# Altium PCB PCB_Rocket_Sheild.PcbDoc
Units mil, origin at the board's own origin, x right, y up, seen from the top; angles counter-clockwise.
Board outline 6000 x 4000 mil, 2 copper layers (Top Layer, Bottom Layer); 19 components, 22 nets, 73 pads, 0 vias.
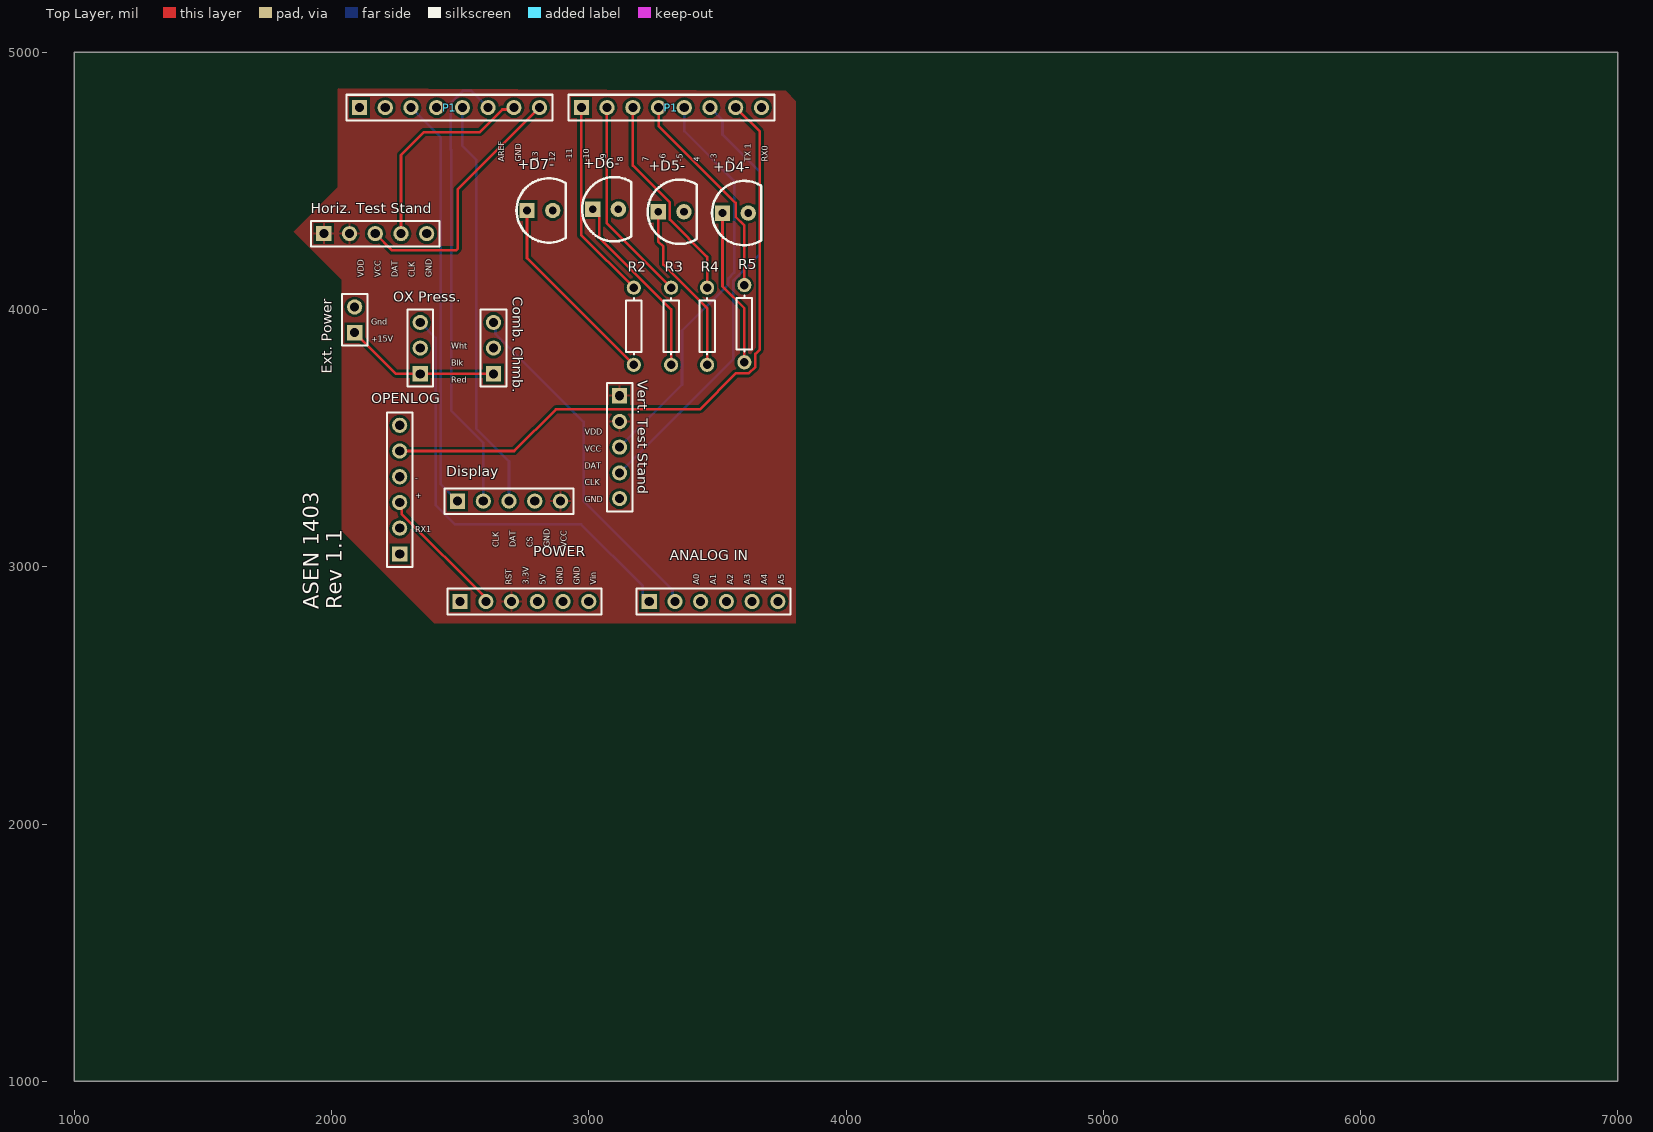
[diagram p0: Top Layer view]
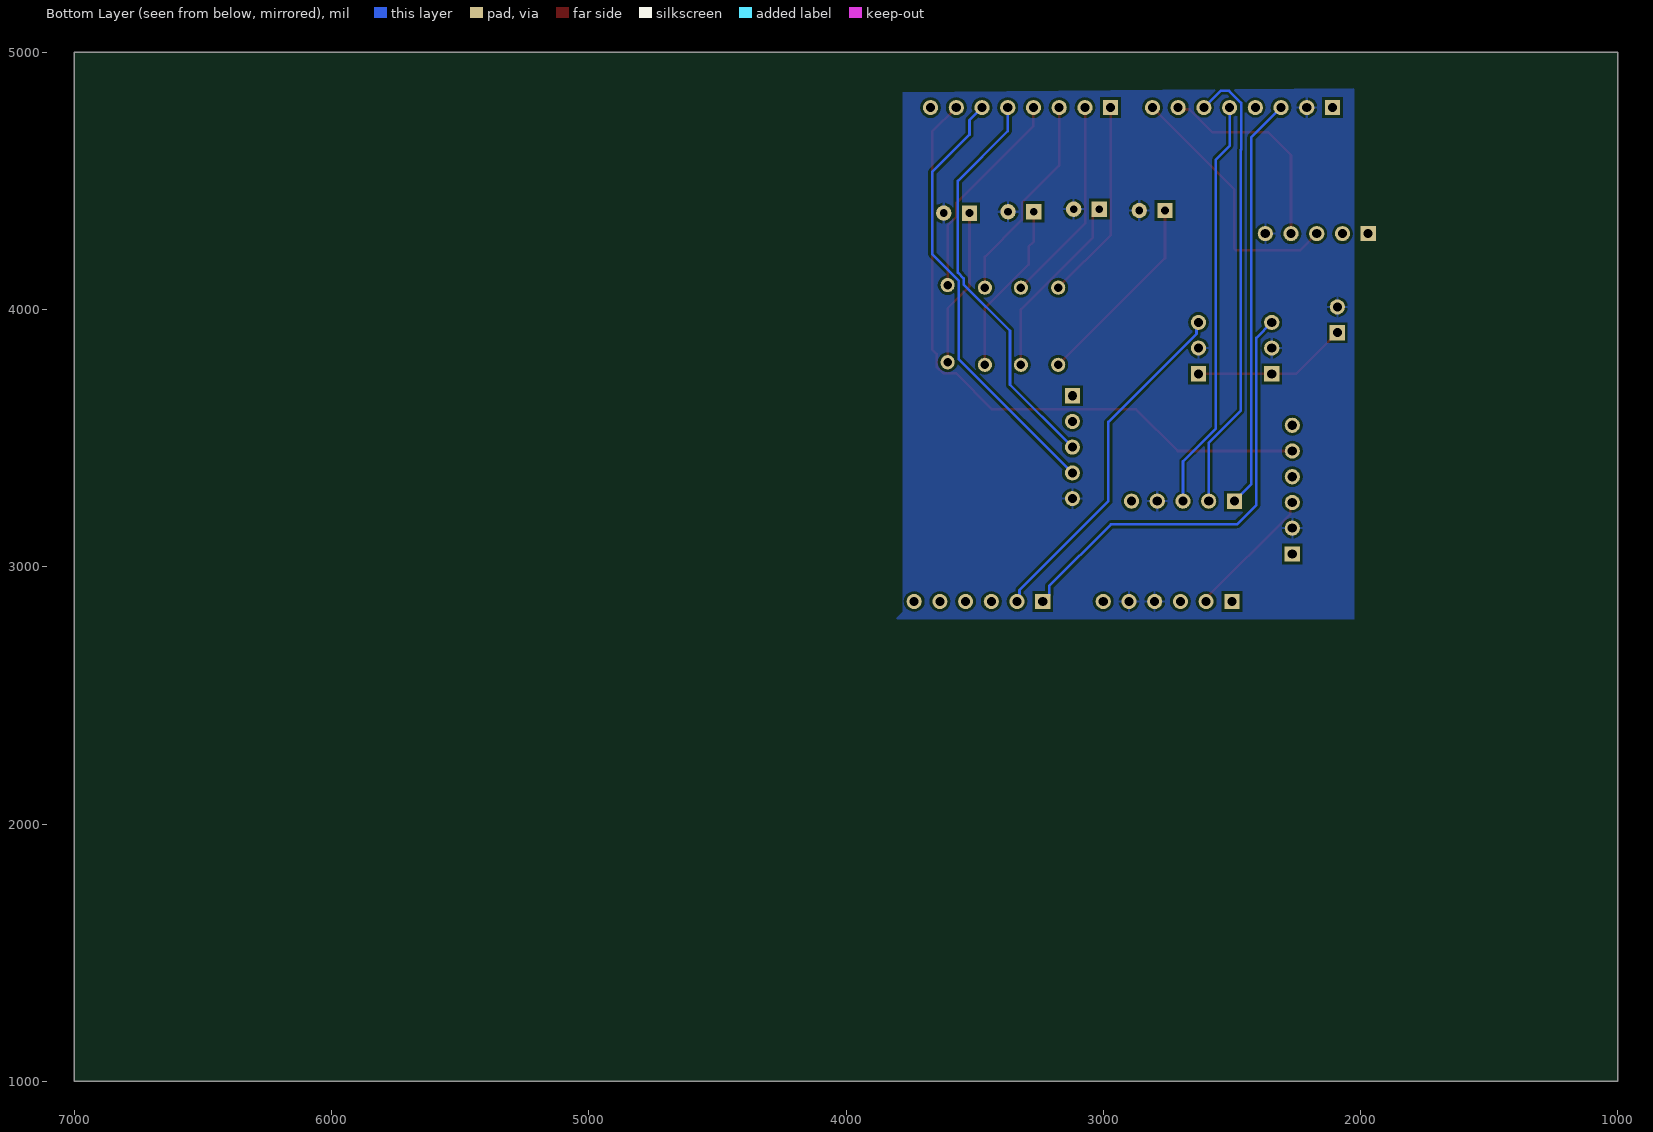
[diagram p1: Bottom Layer view, seen from below]

## Layer stack, top to bottom
Top Solder: solder mask 0.4, Solder Resist, Dk 3.5
Top Layer: signal copper 1.4
Dielectric 1: dielectric 12.6, FR-4, Dk 4.8
Bottom Layer: signal copper 1.4
Bottom Solder: solder mask 0.4, Solder Resist, Dk 3.5

## Board outline
1000,1000 7000,1000 7000,5000 1000,5000

## Design rules (kind name [scope] priority, off if disabled: settings)
Clearance [All] p1: gap=10 ignorepadtopadclearanceinfootprint=FALSE except(0: Arc-Hole Track-Hole SMDPad-Hole THPad-Hole Via-Hole Fill-Hole Poly-Hole Region-Hole Text-Hole)
PolygonConnect [All] p1: connectstyle=Relief reliefconductorwidth=10 reliefentries=4 polygonreliefangle="90 Angle" airgapwidth=10
RoutingVias [All] p1: holewidth=28 width=50 viastyle="Through Hole" minholewidth=28 minwidth=50 maxholewidth=28 maxwidth=50
SolderMaskExpansion [All] p1: expansion=4
Width [All] p1: maxlimit=10 minlimit=10 preferedwidth=10
30 further rules are at their usual default settings.

## Classes and differential pairs
component class Schematic_Rocket_Shield: +D4- +D5- +D6- +D7- "ANALOG IN" "Comb. Chmb." Display "Ext. Power" "Horiz. Test Stand" OPENLOG "OX Press." P1 POWER R2 R3 R4 R5 "Vert. Test Stand"

## Components (designator, comment, footprint, x,y, rotation, side; value= is the part's Value field where it differs from the comment)
+D4- "LED1" PCBComponent_1 3620,4375 r0 top
+D5- "LED1" PCBComponent_1 3370,4380 r0 top
+D6- "LED1" PCBComponent_1 3115,4390 r0 top
+D7- "LED1" PCBComponent_1 2860,4385 r0 top
"ANALOG IN" "Header 6" HDR1X6 3235,2865 r0 top locked
"Comb. Chmb." "Header 3" HDR1X3 2630,3750 r90 top (schematic designator Press2)
Display "LED Display" HDR1X5 2490,3255 r0 top
"Ext. Power" "Header 2" HDR1X2 2090,3910 r90 top
"Horiz. Test Stand" "Load Cell 2" HDR1X5 1970,4295 r0 top (schematic designator "Load Cell 2")
OPENLOG "Header 6" HDR1X6 2265,3050 r90 top
"OX Press." "Header 3" HDR1X3 2345,3750 r90 top (schematic designator Press1)
P1 "Header 8" HDR1X8 2971.25,4785 r0 top locked
P1 "eader 8" HDR1X8 2108.75,4785 r0 top locked
POWER "Header 6" HDR1X6 2500,2865 r0 top locked
R2 "" AXIAL-0.3 3175,3935 r90 top value=330K
R3 "" AXIAL-0.3 3320,3935 r90 top value=330K
R4 "" AXIAL-0.3 3460,3935 r90 top value=330K
R5 "" AXIAL-0.3 3605,3945 r90 top value=330K
"Vert. Test Stand" "Load Cell 1" HDR1X5 3120,3665 r270 top (schematic designator "Load Cell 1")

## Footprints (in the part's own frame and the unit in brackets; to place one, negate y for a bottom-side part, rotate by r counter-clockwise, add the part's x,y. Pads: shape width x height; smd on the part's side, far side on the other; paste and mask are expansions set on the pad)
AXIAL-0.3 [mm] "Axial Device, Thru-Hole; 2 Leads; 0.3 in Pin Spacing"
  round 1.4 hole 0.85: 1(-3.81,0) 2(3.81,0)
  silkscreen extent -2.77,-0.76 2.77,0.76
HDR1X2 [mm] "Connector; Header; 2 Position"
  rect 1.5x1.5 hole 0.9: 1(0,0)
  round 1.5 hole 0.9: 2(2.54,0)
  silkscreen extent -1.27,-1.27 3.81,1.27
HDR1X3 [mm] "Connector; Header; 3 Position"
  rect 1.5x1.5 hole 0.9: 1(0,0)
  round 1.5 hole 0.9: 2(2.54,0) 3(5.08,0)
  silkscreen extent -1.27,-1.27 6.35,1.27
HDR1X5 [mm] "Connector; Header; 5 Position"
  rect 1.5x1.5 hole 0.9: 1(0,0)
  round 1.5 hole 0.9: 2(2.54,0) 3(5.08,0) 4(7.62,0) 5(10.16,0)
  silkscreen extent -1.27,-1.27 11.43,1.27
HDR1X6 [mm] "Connector; Header; 6 Position"
  rect 1.5x1.5 hole 0.9: 1(0,0)
  round 1.5 hole 0.9: 2(2.54,0) 3(5.08,0) 4(7.62,0) 5(10.16,0) 6(12.7,0)
  silkscreen extent -1.27,-1.27 13.97,1.27
HDR1X8 [mm] "Connector; Header; 8 Position"
  rect 1.5x1.5 hole 0.9: 1(0,0)
  round 1.5 hole 0.9: 2(2.54,0) 3(5.08,0) 4(7.62,0) 5(10.16,0) 6(12.7,0) 7(15.24,0) 8(17.78,0)
  silkscreen extent -1.27,-1.27 19.05,1.27
PCBComponent_1 [mil]
  rect 60x60 hole 30: 1(-100,0)
  round 60 hole 30: 2(0,0)
  silkscreen extent -141,-125 50,125

## Part data
+D4- +D5- +D6- +D7-: "Typical RED GaAs LED", LatestRevisionDate=08-Jul-2005, LatestRevisionNote="Mech Layer 1 removed.", PackageDescription="LED; 2 Leads", PackageReference=LED-1, Published=8-Jun-2000, Publisher="Altium Limited"
"ANALOG IN" OPENLOG POWER: "Header, 6-Pin", LatestRevisionDate=17-Jul-2002, LatestRevisionNote="Re-released for DXP Platform.", Publisher="Altium Limited"
"Comb. Chmb." "OX Press.": "Header, 3-Pin", LatestRevisionDate=17-Jul-2002, LatestRevisionNote="Re-released for DXP Platform.", Publisher="Altium Limited"
Display "Horiz. Test Stand" "Vert. Test Stand": library part "Header 5", "Header, 5-Pin", LatestRevisionDate=17-Jul-2002, LatestRevisionNote="Re-released for DXP Platform.", Publisher="Altium Limited"
"Ext. Power": "Header, 2-Pin", LatestRevisionDate=17-Jul-2002, LatestRevisionNote="Re-released for DXP Platform.", Publisher="Altium Limited"
P1: "Header, 8-Pin", LatestRevisionDate=17-Jul-2002, LatestRevisionNote="Re-released for DXP Platform.", Publisher="Altium Limited"
P1: library part "Header 8", "Header, 8-Pin", LatestRevisionDate=17-Jul-2002, LatestRevisionNote="Re-released for DXP Platform.", Publisher="Altium Limited"
R2 R3 R4 R5: library part Res1, "Resistor", LatestRevisionDate=17-Jul-2002, LatestRevisionNote="Re-released for DXP Platform.", PackageDescription="Axial Device, Thru-Hole; 2 Leads; 0.3 in Pin Spacing", PackageReference=AXIAL-0.3, Published=8-Jun-2000, Publisher="Altium Limited"

## Nets (pads, with @x,y where several pads share a name; then routed paths per layer and width w, separated by ;. In a path a pad name is that pad's centre, name@x,y a point inside that pad or via, vN(x,y) a via of type N, cw(c..) or ccw(c..) an arc to the next point about the centre after c; other vN are vias at no path point)
5V: "Horiz. Test Stand.1" "Horiz. Test Stand.2" "Vert. Test Stand.1" "Vert. Test Stand.2" Display.5 POWER.3
GND: "Comb. Chmb..2" "Ext. Power.2" "Horiz. Test Stand.5" "OX Press..2" "Vert. Test Stand.5" +D4-.2 +D5-.2 +D6-.2 +D7-.2 Display.4 OPENLOG.2 P1.2@2208.75,4785 POWER.4 POWER.5
Net+D4-_1: +D4-.1 R5.1 | length 615.2
  Top Layer w10: +D4-.1 3520,4090 3605,4005 R5.1
Net+D5-_1: +D5-.1 R4.1 | length 673.7
  Top Layer w10: +D5-.1 3270,4265 3290,4245 3290,4175.19 3460,4005.19 R4.1
Net+D6-_1: +D6-.1 R3.1 | length 731.3
  Top Layer w10: +D6-.1 3040,4365 3040,4280.19 3320,4000.19 R3.1
Net+D7-_1: +D7-.1 R2.1 | length 771.9
  Top Layer w10: +D7-.1 2760,4200 R2.1
"NetANALOG IN_1": "ANALOG IN.1" "OX Press..3" | length 1740.7
  Bottom Layer w10: 2345,3950 2405,3890 2405,3240 2480,3165 2970,3165 3210.47,2924.53 3210.47,2889.53 3235,2865
"NetANALOG IN_2": "ANALOG IN.2" "Comb. Chmb..3" | length 1384.1
  Bottom Layer w10: 2630,3950 2637.5,3942.5 2637.5,3905.47 2980,3562.97 2980,3255 3325.61,2909.39 3325.61,2874.39 3335,2865 3340,2870
NetDisplay_1: Display.1 P1.3@2308.75,4785 | length 1605.1
  Bottom Layer w10: P1.3@2308.75,4785 2425,4668.75 2425,3320 Display.1
NetDisplay_2: Display.2 P1.6@2608.75,4785 | length 1791.3
  Bottom Layer w10: Display.2 2590,3481.72 2465,3606.72 2465,4621.33 2464.22,4622.11 2464.22,4803.44 2510.78,4850 2543.75,4850 P1.6@2608.75,4785
NetDisplay_3: Display.3 P1.5@2508.75,4785 | length 1605.1
  Bottom Layer w10: P1.5@2508.75,4785 2508.75,4636.25 2562.5,4582.5 2562.5,3537.5 2690,3410 Display.3
"NetExt. Power_1": "Comb. Chmb..1" "Ext. Power.1" "OX Press..1" | length 606.3
  Top Layer w10: 2090,3910 2250,3750 2345,3750 2630,3750
"NetLoad Cell 1_3": "Vert. Test Stand.3" P1.5@3371.25,4785 | length 1595.2
  Bottom Layer w10: 3120,3465 3362.56,3707.56 3362.56,3917.56 3542.44,4097.44 3542.44,4120.91 3565,4143.47 3565,4500 3371.25,4693.75 3371.25,4785 P1.5@3363.75,4777.5
"NetLoad Cell 1_4": "Vert. Test Stand.4" P1.6@3471.25,4785 | length 1726
  Bottom Layer w10: 3120,3365 3562.44,3807.44 3562.44,4112.63 3665,4215.19 3665,4535 3520,4680 3520,4736.25 P1.6@3471.25,4785
"NetLoad Cell 2_3": "Horiz. Test Stand.3" P1.8@2808.75,4785 | length 1030.5
  Top Layer w10: 2170,4295 2235,4230 2484.14,4230 2490,4235.86 2490,4466.25 P1.8@2808.75,4785
"NetLoad Cell 2_4": "Horiz. Test Stand.4" P1.7@2708.75,4785 | length 820.4
  Top Layer w10: 2270,4295 2270,4600 2360,4690 2576.72,4690 2664.22,4777.5 2701.25,4777.5 P1.7@2708.75,4785
NetOPENLOG_3: OPENLOG.3 POWER.2 | length 526.3
  Top Layer w10: OPENLOG.3@2265,3247.5 OPENLOG.3 2272.8,3242.2 2272.8,3205.17 2600,2877.97 POWER.2
NetOPENLOG_5: OPENLOG.5 P1.7@3571.25,4785 | length 2571.8
  Top Layer w10: OPENLOG.5 2709.73,3450 2871.92,3612.19 3432.19,3612.19 3572.44,3752.44 3622.63,3752.44 3647.56,3777.37 3647.56,3827.56 3665,3845 3665,4691.25 P1.7@3571.25,4785
NetP1_1: P1.1@2971.25,4785 R2.2 | length 785.4
  Top Layer w10: P1.1@2971.25,4785 2970,4783.75 2970,4290 R2.2
NetP1_2: P1.2@3071.25,4785 R3.2 | length 804.1
  Top Layer w10: P1.2@3071.25,4785 3070,4783.75 3070,4335 R3.2
NetP1_3: P1.3@3171.25,4785 R4.2 | length 819.6
  Top Layer w10: P1.3@3171.25,4785 3171.25,4559.96 3315,4416.21 3315,4350 3460,4205 R4.2
NetP1_4: P1.4@3271.25,4785 R5.2 | length 828.2
  Top Layer w10: P1.4@3271.25,4785 3271.25,4713.75 3570.68,4414.32 3570.68,4360.68 3605,4326.36 R5.2
pads on no net: "ANALOG IN.3" "ANALOG IN.4" "ANALOG IN.5" "ANALOG IN.6" OPENLOG.1 OPENLOG.4 OPENLOG.6 P1.1@2108.75,4785 P1.4@2408.75,4785 P1.8@3671.25,4785 POWER.1 POWER.6

## Polygon pours and split planes (outlines as drawn)
5V on Top Layer "Top Layer-5V" (solid, pour order 8): 2025,4860 2025,4475 1852.5,4302.5 2040,4115 2040,3140 2400,2780 3805,2780 3805,4810 3765,4850
GND on Bottom Layer "Bottom Layer-GND" (solid, pour order 10): 2025,4860 2025,2795 3800,2795 3805,2800 3780,2825 3780,4845

## Silkscreen, mask and mechanical layers (free items; w line width, h text height)
Top Overlay:
  text "AREF /  / GND /  / 13 /  / 12 /  / -11 /  / -10 /  / -9 /  / 8 /  /  / 7 /  / -6 /  / -5 /  / 4 /  / -3 /  / 2 /  / TX 1 /  / RX0" at 3695,4575 h22 r90
  text "VDD /  / VCC /  / DAT /  / CLK /  / GND" at 2390,4125 h22 r90
  text "Gnd /  / +15V" at 2155,3875 h22
  text "Wht /  / Blk /  / Red" at 2465,3715 h22
  text "VDD /  / VCC /  / DAT /  / CLK /  / GND" at 2985,3250 h22
  text "- /  / + /  /  /  / RX1" at 2325,3135 h22
  text "CLK /  / DAT /  / CS /  / GND /  / VCC" at 2915,3075 h22 r90
  text "RST /  / 3.3V /  / 5V /  / GND /  / GND /  / Vin" at 3030,2930 h22 r90
  text "A0 /  / A1 /  / A2 /  / A3 /  / A4 /  / A5" at 3760,2930 h22 r90
  text "ASEN 1403 / Rev 1.1" at 2040,2835 h60 r90